# Altium PCB Main.PcbDoc
Units mil, origin at the board's own origin, x right, y up, seen from the top; angles counter-clockwise.
Board outline 2645 x 3720 mil, 2 copper layers (Top Layer, Bottom Layer); 53 components, 48 nets, 213 pads, 44 vias.
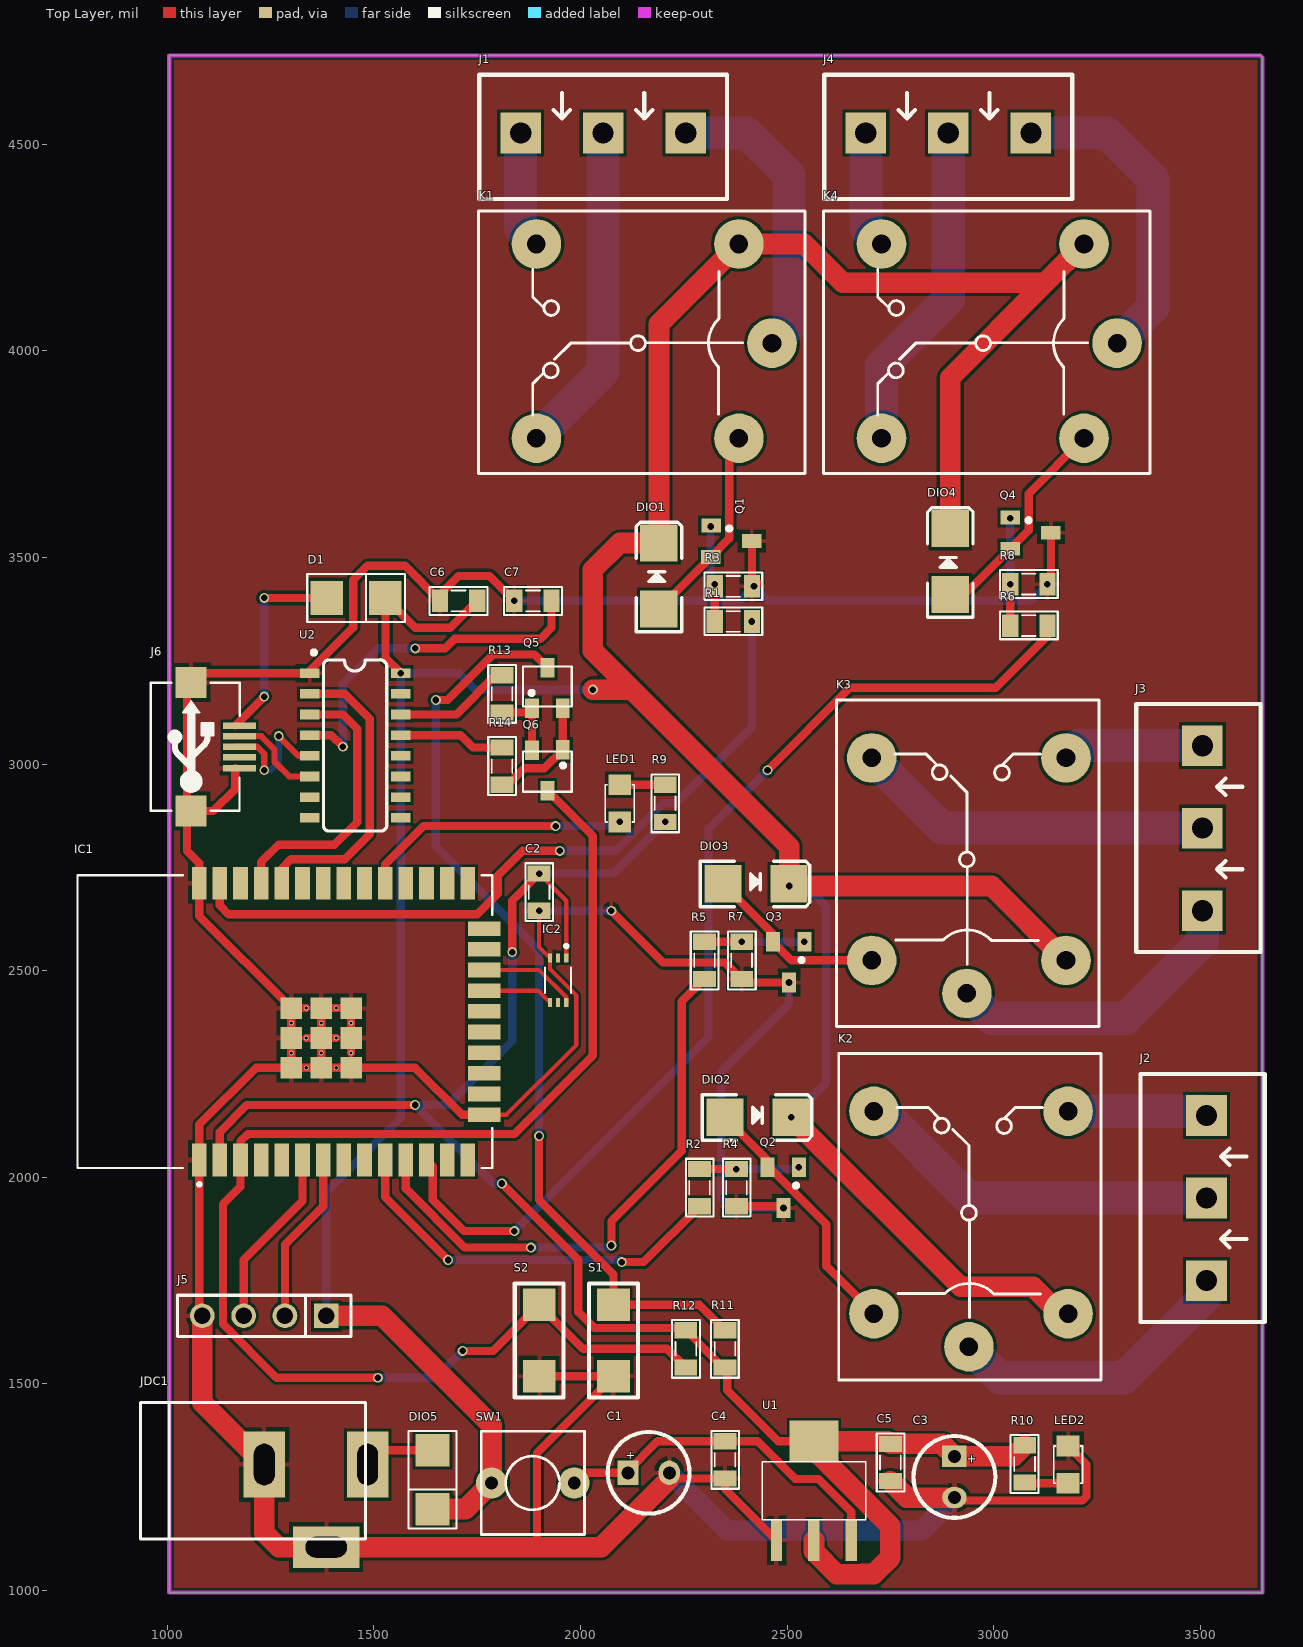
[diagram p0: Top Layer view]
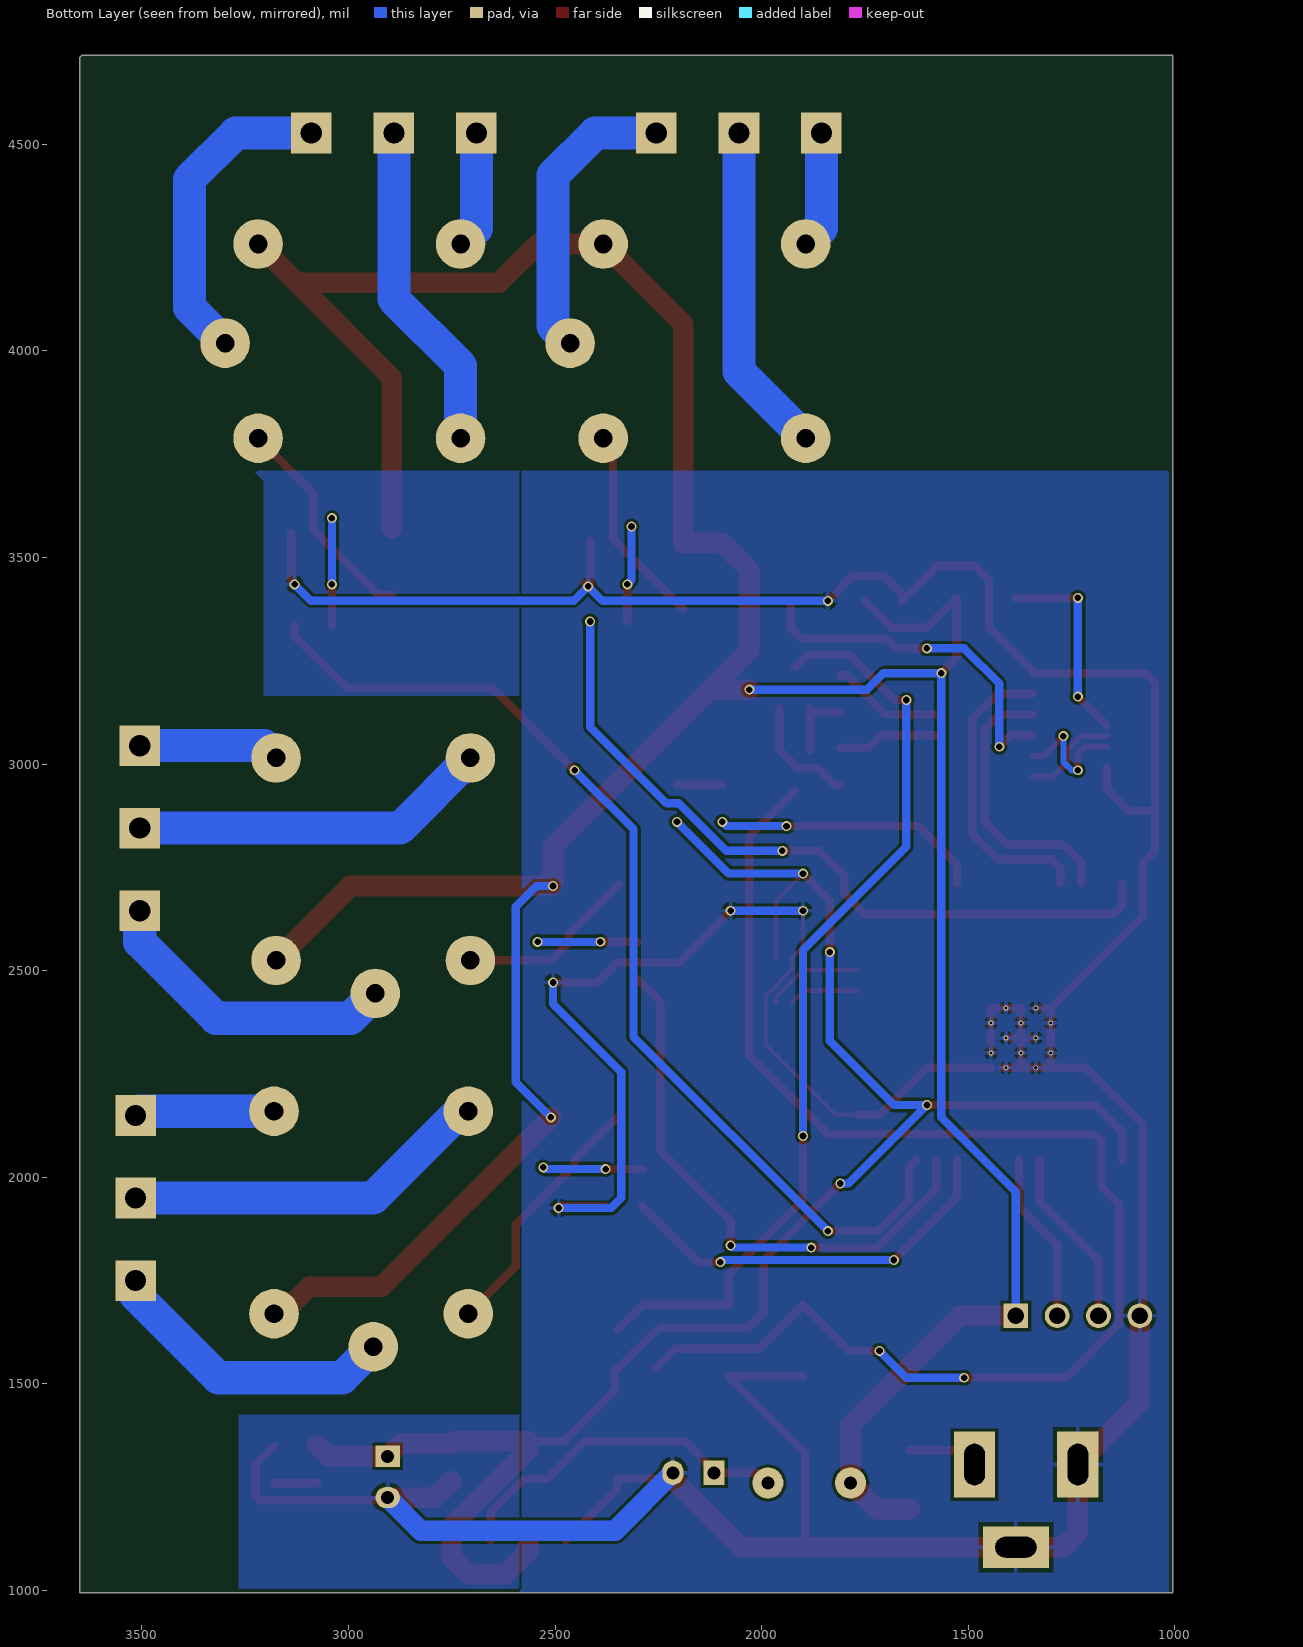
[diagram p1: Bottom Layer view, seen from below]
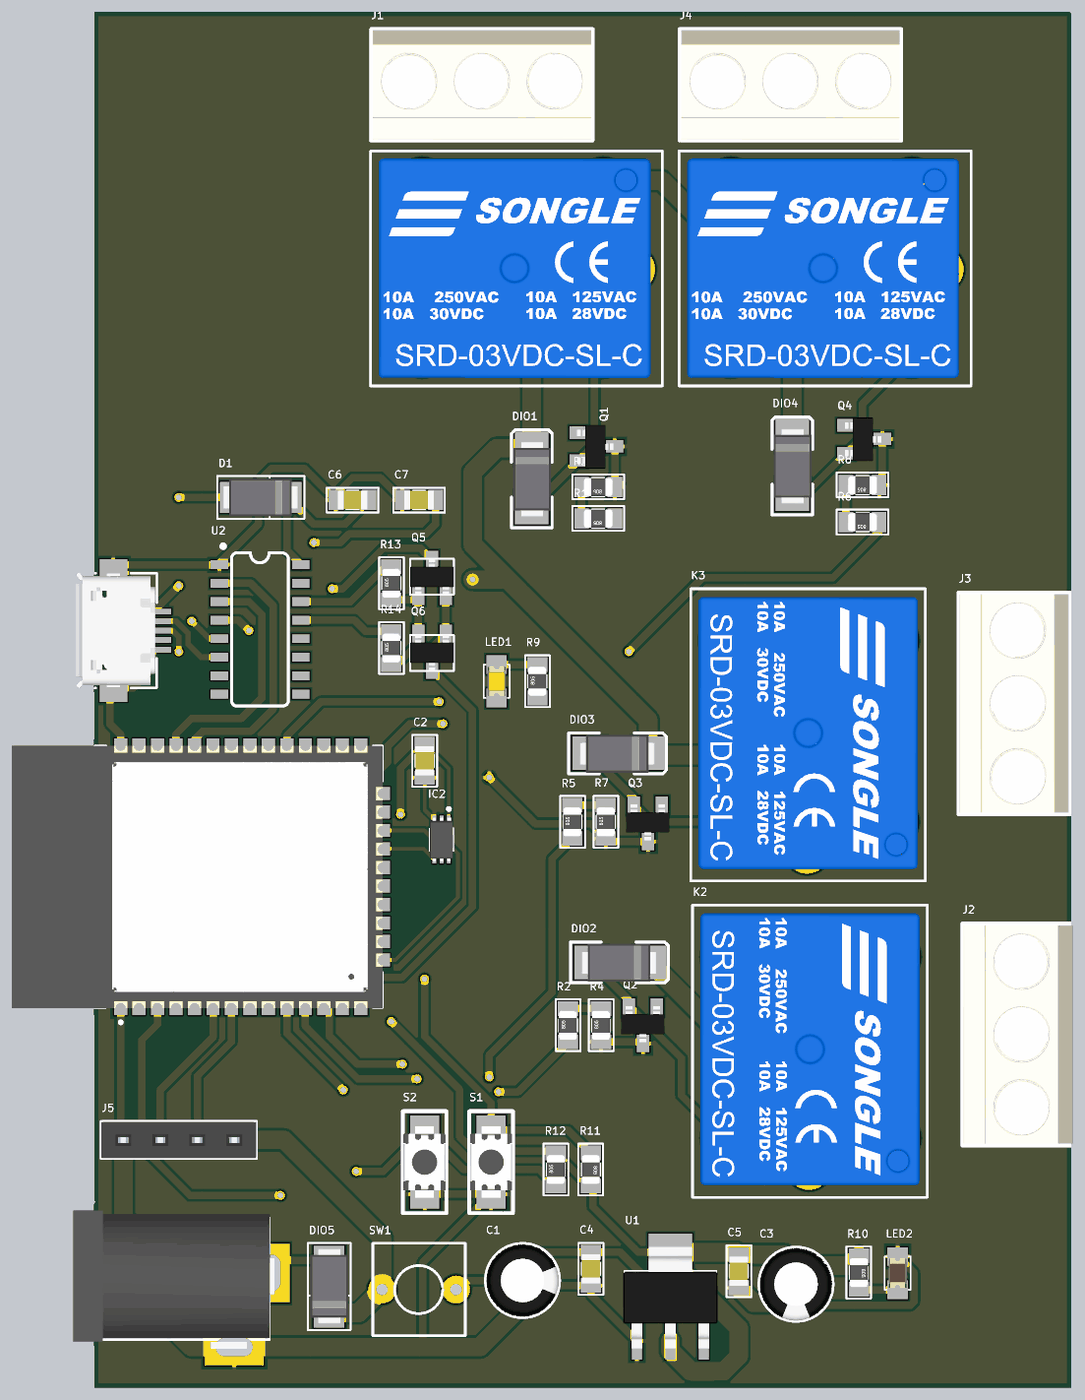
[diagram p2: 3D render of the assembled board from above, using the file's embedded part models]

## Layer stack, top to bottom
Top Solder: solder mask 0.4, Solder Resist, Dk 3.5
Top Layer: signal copper 1.4
Dielectric 1: dielectric 12.6, FR-4, Dk 4.8
Bottom Layer: signal copper 1.4
Bottom Solder: solder mask 0.4, Solder Resist, Dk 3.5

## Board outline
1005,995 1005,4680 1005,4715 3645,4715 3650,4710 3650,995

## Design rules (kind name [scope] priority, off if disabled: settings)
Clearance [All] p1: gap=7 ignorepadtopadclearanceinfootprint=TRUE
DiffPairsRouting [All] p1: maxlimit=10 minlimit=10 mostfreqgap=10 toplayer_minwidth=15 toplayer_maxwidth=15 toplayer_prefwidth=15 bottomlayer_minwidth=15 bottomlayer_maxwidth=15 bottomlayer_prefwidth=15 maxuncoupledlength=500
PolygonConnect [All] p1: connectstyle=Relief reliefconductorwidth=10 reliefentries=4 polygonreliefangle="90 Angle" airgapwidth=10
RoutingVias [All] p1: holewidth=16 width=24 viastyle="Through Hole" minholewidth=12 minwidth=20 maxholewidth=20 maxwidth=28
SolderMaskExpansion [All] p1: expansion=4
Width [All] p1: maxlimit=80 minlimit=10 preferedwidth=20
29 further rules are at their usual default settings.

## Classes and differential pairs
component class U_MCU: C1 C2 C3 C4 C5 C6 C7 D1 DIO5 IC1 IC2 J5 J6 JDC1 LED1 LED2 Q5 Q6 R9 R10 R11 R12 R13 R14 S1 S2 SW1 U1 U2
component class U_Control: DIO1 DIO2 DIO3 DIO4 J1 J2 J3 J4 K1 K2 K3 K4 Q1 Q2 Q3 Q4 R1 R2 R3 R4 R5 R6 R7 R8
differential pair D0: +D0_P -D0_N

## Components (designator, comment, footprint, x,y, rotation, side; value= is the part's Value field where it differs from the comment)
C1 "220uF/10V" C5mm 2165,1285 r0 top
C2 "10uF" CAP_0805 1900,2690 r90 top value=33p
C3 "220uF/10V" C5mm 2905,1275 r270 top
C4 "220nF" CAP_0805 2350,1316.5 r90 top value=33p
C5 "100nF" CAP_0805 2750,1310 r90 top value=33p
C6 "10uF" CAP_0805 1705,3395 r0 top value=33p
C7 "100nF" CAP_0805 1885,3395 r0 top value=33p
D1 "Diode SMD" DIO-214AC(SMA) 1460,3400 r180 top value=1N5007
DIO1 "1N4148" DIO-SMD-106 2190,3455 r270 top value=1N5007
DIO2 "1N4148" DIO-SMD-106 2430,2145 r180 top value=1N5007
DIO3 "1N4148" DIO-SMD-106 2425,2710 r180 top value=1N5007
DIO4 "1N4148" DIO-SMD-106 2895,3490 r270 top value=1N5007
DIO5 "Diode SMD" DIO-214AC(SMA) 1640,1265.5 r90 top value=1N5007
IC1 "ESP32-WROOM-32" MODULE_ESP32-WROOM-32 1284.57,2376.61 r90 top
IC2 "BH1750" BH1750 1945,2490 r270 top
J1 "KF3" KF3-5.08 2255,4527 r180 top
J2 "KF3" KF3-5.08 3515,1750 r90 top
J3 "KF3" KF3-5.08 3505,2645 r90 top
J4 "KF3" KF3-5.08 3090,4527 r180 top
J5 "JP4" JP4-C1T 1385,1665 r180 top
J6 "USB-5" USB-M1 1175,3042 r90 top
JDC1 "Jac DC" DC-IN 1360,1205 r0 top
K1 "Relay-SPDT" RELAY5PIN-10A 2463.5,4018.5 r180 top
K2 "Relay-SPDT" RELAY5PIN-10A 2940,1590 r90 top
K3 "Relay-SPDT" RELAY5PIN-10A 2935,2445 r90 top
K4 "Relay-SPDT" RELAY5PIN-10A 3298.5,4018.5 r180 top
LED1 "LED" LED-0805-Orange 2095,2950 r270 top value="LED 3 ly Single Colour"
LED2 "LED" LED-0805-Red 3180,1260 r90 top value="LED 3 ly Single Colour"
Q1 "2SC1815" SOT23 2365,3540 r270 top value=C1815
Q2 "2SC1815" SOT23 2491.48,1975 r180 top value=C1815
Q3 "2SC1815" SOT23 2505,2520.66 r180 top value=C1815
Q4 "2SC1815" SOT23 3089.33,3560 r270 top value=C1815
Q5 "2SC1815" SOT23D 1920,3184.21 r0 top value=C1815
Q6 "2SC1815" SOT23D 1920,2985 r180 top value=C1815
R1 "330R" RES-SMD-0805 2370,3345 r180 top
R2 "330R" RES-SMD-0805 2287.98,1975 r90 top
R3 "100k" RES-SMD-0805 2370,3430 r180 top
R4 "100k" RES-SMD-0805 2377.45,1975 r90 top
R5 "330R" RES-SMD-0805 2300,2525 r90 top
R6 "330R" RES-SMD-0805 3085,3335 r180 top
R7 "100k" RES-SMD-0805 2390.22,2525 r90 top
R8 "100k" RES-SMD-0805 3085,3435.22 r180 top
R9 "10k" RES-SMD-0805 2205,2905 r90 top
R10 "1k" RES-SMD-0805 3075,1306.5 r270 top
R11 "10k" RES-SMD-0805 2350,1585 r270 top
R12 "10k" RES-SMD-0805 2255,1585 r90 top
R13 "10k" RES-SMD-0805 1810,3170 r90 top
R14 "10k" RES-SMD-0805 1810,2995 r90 top
S1 "SW-SMD" "SW 3x2x4" 2080,1605 r270 top
S2 "SW-SMD" "SW 3x2x4" 1900,1605 r270 top
SW1 "SW" SW2 1785,1260.5 r0 top value="SW chip 2 pin"
U1 "LM1117-ADJ" LM1117-SOP 2565,1171.5 r0 top
U2 "CH340C" SOP-16 1455,3045 r270 top

## Footprints (in the part's own frame and the unit in brackets; to place one, negate y for a bottom-side part, rotate by r counter-clockwise, add the part's x,y. Pads: shape width x height; smd on the part's side, far side on the other; paste and mask are expansions set on the pad)
BH1750 [mm] "Light_sensor_I2c"
  rect 0.55x0.25 smd: 1(-1.045,0.525) 2(-1.045,0.025) 3(-1.045,-0.475) 4(1.705,-0.475) 5(1.705,0.025) 6(1.705,0.525)
  silkscreen extent -1.87,-0.77 1.11,0.83, body extent -1.17,-0.77 1.83,0.83, height 0.75
C5mm [mm]
  rect 1.3x1.5 hole 0.8: 1(-1.27,0)
  oval 1.3x1.5 hole 0.8: 2(1.27,0)
  silkscreen extent -2.51,-2.51 2.51,2.51, body extent -2.5,-2.5 2.49,2.5, height 11.01
CAP_0805 [mil]
  rect 39.37x55 smd: 1(-45,0) 2(45,0)
  silkscreen extent -70,-34 70,33, body extent -40,-25 40,25, height 24
DC-IN [mil] "Jac DC input"
  rect 100x160 hole 50 slot 100 at 90 deg: 1(125,100) 2(-125,100)
  rect 160x100 hole 50 slot 100 at 0 deg: 3(25,-100)
  silkscreen extent -425,-80 120,250, body extent -410,-105 134,269, height 434
DIO-214AC(SMA) [mm] "DO-214AC Diode Smallest Size"
  rect 2x2.1 smd: 1(1.88,-0.051) 2(-1.732,-0.051)
  silkscreen extent -2.92,-1.52 3.07,1.42, body extent -2.5,-1.35 2.7,1.25, height 2.4
DIO-SMD-106 [mil]
  rect 90x90.55 smd: 1(80,0) 2(-80,0)
  silkscreen extent -130,-55 135,55, body extent -99,-50 106,52, height 95
JP4-C1T [mm] "4 row, straight, gold plating"
  rect 1.52x1.52 hole 1.02: 1(0,0)
  round 1.52 hole 1.02: 2(2.54,0) 3(5.08,0) 4(7.62,0)
  silkscreen extent -1.52,-1.27 9.14,1.27, body extent -1.52,-1.25 9.14,1.25, height 8.51
KF3-5.08 [mm]
  rect 2.5x2.5 hole 1.3: 1(0,0) 2(5.08,0) 3(10.147,0)
  silkscreen extent -2.54,-3.58 12.7,4.06, body extent -2.42,-3.51 12.58,3.99, height 10
LED-0805-Orange [mil]
  rect 50x55 smd: 1(0,0) 2(90,0)
  silkscreen extent 0,-35 90,35, body extent 5,-25 85,25, height 43
LED-0805-Red [mil]
  rect 50x55 smd: 1(0,0) 2(90,0)
  silkscreen extent 0,-35 90,35, body extent 5,-25 85,25, height 43
LM1117-SOP [mm]
  rect 0.7x2.54 smd: 1(-2.3,-1.27) 2(0,-1.27) 3(2.3,-1.27)
  rect 3x2.54 smd: 2(0,4.826)
  silkscreen extent -3.17,0 3.17,3.56, body extent -3.25,-1.78 3.25,5.18, height 1.68
MODULE_ESP32-WROOM-32 [mm]
  rect 2x0.9 smd: 1(-8.5,5.26) 2(-8.5,3.99) 3(-8.5,2.72) 4(-8.5,1.45) 5(-8.5,0.18) 6(-8.5,-1.09) 7(-8.5,-2.36) 8(-8.5,-3.63) 9(-8.5,-4.9) 10(-8.5,-6.17) 11(-8.5,-7.44) 12(-8.5,-8.71) 13(-8.5,-9.98) 14(-8.5,-11.25) 25(8.5,-11.25) 26(8.5,-9.98) 27(8.5,-8.71) 28(8.5,-7.44) 29(8.5,-6.17) 30(8.5,-4.9) 31(8.5,-3.63) 32(8.5,-2.36) 33(8.5,-1.09) 34(8.5,0.18) 35(8.5,1.45) 36(8.5,2.72) 37(8.5,3.99) 38(8.5,5.26)
  rect 0.9x2 smd: 15(-5.715,-12.25) 16(-4.445,-12.25) 17(-3.175,-12.25) 18(-1.905,-12.25) 19(-0.635,-12.25) 20(0.635,-12.25) 21(1.905,-12.25) 22(3.175,-12.25) 23(4.445,-12.25) 24(5.715,-12.25)
  rect 1.33x1.33 smd: 39_1(-2.835,-0.405) 39_2(-1,-0.405) 39_3(0.835,-0.405) 39_4(-2.835,-2.24) 39_5(-1,-2.24) 39_6(0.835,-2.24) 39_7(-2.835,-4.075) 39_8(-1,-4.075) 39_9(0.835,-4.075)
  round 0.3 hole 0.2: 39_10(-1.917,-0.405) 39_11(-0.082,-0.405) 39_12(-2.835,-1.322) 39_13(-1,-1.322) 39_14(0.835,-1.322) 39_15(-1.917,-2.24) 39_16(-0.082,-2.24) 39_17(-2.835,-3.157) 39_18(-1,-3.157) 39_19(0.835,-3.157) 39_20(-1.917,-4.075) 39_21(-0.082,-4.075)
  silkscreen extent -10.1,-12.75 9,12.75, body extent -10.54,-12.75 8.98,12.75, height 3.2
RELAY5PIN-10A [mil]
  round 120 hole 45: 1(0,0) 2(570,230) 3(570,-240) 4(80,-240) 5(80,230)
  silkscreen extent -80,-320 710,315, body extent -48,-300 688,294, height 102
RES-SMD-0805 [mil]
  rect 39.37x55 smd: 1(-45,0) 2(45,0)
  silkscreen extent -70,-34 70,33, body extent -39,-25 39,25, height 31
SOP-16 [mm]
  rect 0.6x1.2 smd: 1(-4.445,-2.8) 2(-3.175,-2.8) 3(-1.905,-2.8) 4(-0.635,-2.8) 5(0.635,-2.8) 6(1.905,-2.8) 7(3.175,-2.8) 8(4.445,-2.8) 9(4.445,2.8) 10(3.175,2.8) 11(1.905,2.8) 12(0.635,2.8) 13(-0.635,2.8) 14(-1.905,2.8) 15(-3.175,2.8) 16(-4.445,2.8)
  silkscreen extent -5.84,-2.67 5.26,1.95, body extent -4.95,-3.47 4.95,3.47, height 1.75
SOT23 [mm] "SOT 23 _ 1-3-2"
  rect 0.85x1.2 smd: 1(-0.94,-1.245) 2(0.985,-1.25) 3(0.005,1.25)
  silkscreen extent -0.88,-0.25 -0.64,0, body extent -1.47,-1.33 1.53,1.17, height 1.06
SOT23D [mm] "SOT 23C - 1-3-2 - BCE"
  rect 0.85x1.2 smd: 1(-0.95,-1.25) 2(0.94,-1.245) 3(0,1.25)
  silkscreen extent -1.5,-1.14 1.5,1.32, body extent -1.5,-1.17 1.5,1.33, height 1.06
SW2 [mil] "SW button 2pin, 250x 250 mil"
  round 75 hole 31: 1(0,0) 2(200,0)
  silkscreen extent -25,-125 225,125
"SW 3x2x4" [mm]
  rect 2x2 smd: 1(-2.2,0) 2(2.2,0)
  silkscreen extent -3.5,-1.5 3.5,1.5, body extent -2.45,-1.45 2.45,1.45, height 2
USB-M1 [mm]
  rect 0.4x2 smd: 1(1.3,0) 2(0.65,0) 3(0,0) 4(-0.65,0) 5(-1.321,0)
  rect 1.9x1.9 smd: 5(-3.95,2.968) 5(3.95,2.968)
  silkscreen extent -3.94,-0.03 3.94,5.46, body extent -3.98,0.11 4,5.54, height 2.71

## Part data
C1 C3: library part "Cap Pol", "Polarized Capacitor (Axial)", LatestRevisionDate=17-Jul-2002, LatestRevisionNote="Re-released for DXP Platform.", PackageReference=POLAR0.8, Published=8-Jun-2000, Publisher="Altium Limited"
C2 C4 C5 C6 C7: library part CapSMD, "Capacitor", LatestRevisionDate=17-Jul-2002, LatestRevisionNote="Re-released for DXP Platform.", PackageReference=RAD-0.3, Published=8-Jun-2000, Publisher="Altium Limited"
D1 DIO5: "Default Diode", Code - JEDEC=DO-214-AB, Published=8-Jun-2000, Publisher="Altium Limited", Revision="July-2002: Re-released for DXP Platform."
DIO1 DIO2 DIO3 DIO4: library part "Diode SMD", "Default Diode", Code - JEDEC=DO-214-AB, Published=8-Jun-2000, Publisher="Altium Limited", Revision="July-2002: Re-released for DXP Platform."
IC1: "Bluetooth, WiFi Transceiver Module 2.4GHz ~ 2.5GHz Surface Mount", Package="Module Espressif Systems", Digi-Key_Part_Number=1904-1010-1-ND, Digi-Key_Purchase_URL=https://www.digikey.com/product-detail/en/espressif-systems/ESP32-WROOM-32/1904-1010-1-ND/8544305?utm_source=snapeda&utm_medium=aggregator&utm_campaign=symbol, MF="Espressif Systems", MP=ESP32-WROOM-32, SnapEDA_Link=https://www.snapeda.com/parts/ESP32-WROOM-32/Espressif%20Systems/view-part/2753322/?ref=snap
J1 J2 J3 J4: Manufacturer="Würth Elektronik eiSos GmbH", partNo=691103110003, ComponentLink1 Description=Manufacturer, ComponentLink1URL=http://www.we-online.com, ComponentLink2 Description=Datasheet, ComponentLink2URL=http://katalog.we-online.de/em/datasheet/6911031100xx.pdf, Created by="Karrer Zheng", Created Date="29 October 2013", NoPins=3
J5: "WR-PHD 2.54 mm Angled Socket Header", Manufacturer="W¨¹rth Elektronik eiSos GmbH", partNo=613004143121, ComponentLink1 Description=Manufacturer, ComponentLink1URL=http://www.we-online.com, ComponentLink2 Description=Datasheet, ComponentLink2URL=http://katalog.we-online.de/em/datasheet/6130xx143121.pdf, Created by="Karrer Zheng", Created Date="29 March 2013", NoPins=04
J6: Manufacturer=FCI, Manufacturer Part Number=10118193-0001LF, Supplier Part Number 1=609-4616-1-ND, .Checked PCB=RF, .Checked SCH=MM, .Creator=MM, Category="Connectors, Interconnects", ComponentLink1Description=http://portal.fciconnect.com/Comergent//fci/drawing/10118193.pdf, ComponentLink1URL=http://portal.fciconnect.com/Comergent//fci/drawing/10118193.pdf, Connector Type="USB - micro B", Features="Shielded, Solder Retention", Gender=Receptacle, Ingress Protection=-, Mounting Type="Surface Mount, Right Angle, Horizontal", Number of Contacts=5, Packaging="Cut Tape (CT)", Pricing 1="1=0.46, 10=0.433, 25=0.3712, 50=0.3156, 100=0.3032, 250=0.27224, 500=0.25988 (USD)", RoHS="RoHS Compliant", Specifications="USB 2.0", Stock 1=28642, Supplier 1=Digi-Key
JDC1: library part DCIN, "Jac DC input"
K1 K2 K3 K4: "Single-Pole Dual-Throw Relay", LatestRevisionDate=17-Jul-2002, LatestRevisionNote="Re-released for DXP Platform.", PackageReference=MODULE5B, Published=24-Mar-1999, Publisher="Altium Limited"
LED1 LED2: "LED Single colour Green and Red"
Q1 Q2 Q3 Q4: "NPN 600mW, ECB", =C2383
Q5 Q6: library part C1815, "NPN 600mW, ECB", =C2383
R1 R2 R3 R4 R5 R6 R7 R8: library part "Resistor - SMD", "Resistor", Manufacturer="Generic Components", Class=Passive, Published=08/06/2000, Publisher="Altium Hobart Technology Centre"
R9 R10 R11 R12 R13 R14: library part "Resistor - SMD", "Resistor SMD", Manufacturer="Generic Components", Class=Passive, Published=08/06/2000, Publisher="Altium Hobart Technology Centre"
S1 S2: "Switch", LatestRevisionDate=17-Jul-2002, LatestRevisionNote="Re-released for DXP Platform.", PackageReference=SPST-2, Published=24-Mar-1999, Publisher="Altium Limited"
SW1: library part SW2, "Switch button 2 pin"
U1: "800mA Low-Dropout Linear Regulator", Creator="Nguyen Ba Bien", Website=http://group3i.net
U2: "USB to serial chip CH340", Package=Package, Availability=Unavailable, Check_prices=https://www.snapeda.com/parts/CH340C/WCH/view-part/5428851/?ref=eda, MF=WCH, MP=CH340C, Price=None, SnapEDA_Link=https://www.snapeda.com/parts/CH340C/WCH/view-part/5428851/?ref=snap

## Via types
v1: diameter 24, hole 16, Top Layer to Bottom Layer, 44 vias

## Nets (pads, with @x,y where several pads share a name; then routed paths per layer and width w, separated by ;. In a path a pad name is that pad's centre, name@x,y a point inside that pad or via, vN(x,y) a via of type N, cw(c..) or ccw(c..) an arc to the next point about the centre after c; other vN are vias at no path point)
3V3: C2.2 C3.1 C5.2 IC1.2 IC2.1 R9.1 R10.1 R11.2 R12.2 U1.2 | length 4419.9
  Top Layer w10: v1(1900,2735) 1965.68,2669.31 IC2.1
  Top Layer w20: IC1.2 1127.48,2110 1192.48,2175 v1(1600,2175) ; v1(1810,1985) 1995,1800 1995,1673.83 2033.59,1635.24 R12.2@2240,1635.24 ; v1(1835,2545) 1835,2670 1850,2685 v1(1900,2735) ; R12.2 2345,1540 R11.2 2355,1535 2355,1485 2478.5,1361.5 2565,1361.5 U1.2@2565,1340.95
  Top Layer w50: U1.2@2565,1121.5 2565,1095 2620.5,1039.5 2682.59,1039.5 2683.09,1040 2710,1040 2750,1080 2750,1155.95 U1.2@2565,1340.95 ; U1.2@2565,1361.5 2743.5,1361.5 C5.2 2875,1355 C3.1 3048.5,1325 R10.1
  Bottom Layer w20: v1(1810,1985) 1790,1985 v1(1600,2175) 1680,2175 1835,2330 v1(1835,2545) ; v1(1900,2735) 2080,2735 v1(2205,2860)
5V: C6.2 D1.2 DIO1.2 DIO2.2 DIO3.2 DIO4.2 DIO5.2 J5.1 K1.4 K2.4 K3.4 K4.4 SW1.1 U2.16 | length 9319.7
  Top Layer w20: v1(1565.24,3220) 1528.2,3257.03 D1.2 1600.2,3330 1685,3330 C6.2
  Top Layer w50: J5.1 1520,1665 1785,1400 SW1.1 1721.8,1197.3 DIO5.2 ; v1(2030,3180) 2125,3180 ; v1(2510,2145) 2920,1735 3095,1735 3160,1670 K2.4 ; DIO4.2 2895,3935 3125,4165 ; K3.4 2995,2705 2510,2705 DIO3.2 2505,2800 2125,3180 ; K4.4 3125,4165 ; 2125,3180 2030,3275 2030,3470 2095,3535 DIO1.2 2190,4065 K1.4 2541.5,4258.5 2635,4165 3125,4165
  Bottom Layer w20: J5.1 1385,1965 1565.24,2145.24 v1(1565.24,3220) 1705,3220 1745,3180 v1(2030,3180) ; v1(2505,2705) 2545,2705 2595,2655 2595,2230 v1(2510,2145)
C0: J1.1 K1.1 | length 715.9
  Bottom Layer w80: J1.1 2403,4527 2505,4425 2505,4060 K1.1
C1: J2.1 K2.1 | length 723.9
  Bottom Layer w80: K2.1 3015,1515 3315,1515 3515,1715 J2.1
C2: J3.1 K3.1 | length 746.5
  Bottom Layer w80: K3.1 2995,2385 3320,2385 3505,2570 J3.1
C3: J4.1 K4.1 | length 773.7
  Bottom Layer w80: J4.1 3273,4527 3385,4415 3385,4105 K4.1
D0_N: J6.2 U2.6 | length 237.8
  Top Layer w15: J6.2@1165,3067.59 1227.41,3067.59 1260,3035 1260,3005 1295,2970 U2.6
D0_P: J6.3 U2.5 | length 317.2
  Top Layer w15: J6.3@1165,3042 1217.64,3042 1235,3024.64 v1(1235,2985) ; v1(1270,3067.59) 1317.59,3020 U2.5
  Bottom Layer w15: v1(1235,2985) 1250,2985 1270,3005 v1(1270,3067.59)
GND: C1.2 C2.1 C3.2 C4.1 C5.1 C6.1 C7.1 IC1.1 IC1.15 IC1.38 IC1.39_1 IC1.39_2 IC1.39_3 IC1.39_4 IC1.39_5 IC1.39_6 IC1.39_7 IC1.39_8 IC1.39_9 IC1.39_10 IC1.39_11 IC1.39_12 IC1.39_13 IC1.39_14 IC1.39_15 IC1.39_16 IC1.39_17 IC1.39_18 IC1.39_19 IC1.39_20 IC1.39_21 IC2.3 J5.4 J6.5 JDC1.2 JDC1.3 LED2.2 Q1.3 Q2.3 Q3.3 Q4.3 R3.1 R4.1 R7.1 R8.1 S1.2 S2.2 U1.1 U2.1 | length 11852.3
  Top Layer w10: IC1.15 1821.61,2151.61 1990,2320 1990,2440 1926.32,2503.68 IC2.3 1900,2557.45 v1(1900,2645)
  Top Layer w20: J5.4 1077.48,1672.52 IC1.1 1077.48,2127.48 1215,2265 IC1.39_1 ; J6.5@1165,2990 1165,2940 1111.49,2886.49 J6.5@1048.16,2886.49 ; IC1.39_13 IC1.39_5 ; IC1.39_14 IC1.39_3 ; IC1.39_18 IC1.39_5 ; IC1.39_7@1420,2265 IC1.39_17 IC1.39_4 ; IC1.39_7 1600,2265 1713.39,2151.61 IC1.15 ; IC1.39_20 IC1.39_8 IC1.39_21 IC1.39_9 IC1.39_19 IC1.39_6 IC1.39_16 IC1.39_5 ; v1(1840,3395) 1780,3455 1705,3455 1660,3410 C6.1 1575,3480 1485,3480 1450,3445 1450,3330 1344.76,3224.76 U2.1 1070.65,3220 1048.16,3197.51 J6.5@1048.16,2886.49 ; 1895,1105 1895,1333.39 S1.2 S2.2 ; v1(2075,2645) 2200,2520 2350.22,2520 R7.1 2398.77,2471.45 v1(2504.8,2471.45) ; C1.2 2228.5,1271.5 C4.1 2350,1245.95 U1.1 ; R4.1 2487.07,1930 v1(2491.28,1925.79) ; Q1.3 2415,3539.01 R3.1 ; v1(2420,3430) R3.1@2429.21,3439.21 ; C3.2 2905,1218 3214.54,1218 3224.5,1227.96 3224.5,1305.5 LED2.2 ; R8.1 3138.55,3443.77 Q4.3 ; J6.5@1048.16,2886.49 1048.16,2790 1077.48,2760.68 IC1.38 1077.48,2632.52 IC1.39_3 ; IC1.39_1 IC1.39_10 IC1.39_2 IC1.39_11 IC1.39_3 ; IC1.39_1 IC1.39_12 IC1.39_4 ; IC1.39_4 IC1.39_15 IC1.39_5
  Top Layer w50: J5.4 1085,1455 JDC1.2 1235,1140 1270,1105 JDC1.3 1895,1105 2050,1105 2215,1270 C1.2 ; C5.1 2790,1225 C3.2
  Bottom Layer w20: v1(1840,3395) 2385,3395 v1(2420,3430) 2455,3395 3090,3395 v1(3130,3435) ; v1(1900,2645) v1(2075,2645) ; v1(2491.28,1925.79) 2364.21,1925.79 2340,1950 2340,2255 2504.8,2419.8 v1(2504.8,2471.45)
  Bottom Layer w50: C1.2 2355,1145 2825,1145 C3.2
GPIO0: Q5.3 R11.1 S1.1 | length 2260.7
  Top Layer w20: v1(1650,3155) 1678.77,3155 1788.77,3265 1888.43,3265 Q5.3 ; v1@1900,2095 1900,1945 2080,1765 S1.1 2288.39,1691.61 R11.1
  Bottom Layer w20: v1(1650,3155) 1650,2800 1900,2550 v1(1900,2100)
IO5: IC1.29 LED1.2 | length 651.2
  Top Layer w20: IC1.29 1527.48,2757.48 1620,2850 v1@1935,2850
  Bottom Layer w20: v1(1940,2850) 2085,2850 v1(2095,2860)
NC0: J1.2 K1.2 | length 805.4
  Bottom Layer w80: K1.2 2055,3950 J1.2
NC1: J2.2 K2.2 | length 892
  Bottom Layer w80: K2.2 2730,2160 2940,1950 J2.2
NC2: J3.2 K3.2 | length 870.4
  Bottom Layer w80: K3.2 2875,2845 J3.2
NC3: J4.2 K4.2 | length 805.4
  Bottom Layer w80: K4.2 2728.5,3963.5 2890,4125 J4.2
NetC1_1: C1.1 C4.2 SW1.2 U1.3 | length 854.9
  Top Layer w20: SW1.2 2009.5,1285 C1.1 2115,1290 2186.5,1361.5 C4.2 2428.5,1361.5 2520,1270 2575.55,1270 2655.55,1190 U1.3
NetC7_2: C7.2 U2.4 | length 870.8
  Top Layer w20: U2.4 1397,3070 v1(1425,3042) ; v1(1600.2,3280) 1672.48,3280 1695.48,3303 1903,3303 1930,3330 C7.2
  Bottom Layer w20: v1(1425,3042) 1425,3195 1510,3280 v1(1600.2,3280)
NetD1_1: D1.1 J6.1 | length 488.8
  Top Layer w20: J6.1@1165,3093.18 v1(1235,3163.18) ; v1(1235,3402) D1.1
  Bottom Layer w20: v1(1235,3163.18) v1(1235,3402)
NetDIO1_1: DIO1.1 K1.5 Q1.2 | length 493.7
  Top Layer w20: DIO1.1 2190,3375.41 Q1.2 2360,3545.41 2360,3765 K1.5
NetDIO2_1: DIO2.1 K2.5 Q2.2 | length 626.8
  Top Layer w20: DIO2.1 2452.69,2042.31 Q2.2 2457.25,2024.21 2595,1886.47 2595,1785 K2.5
NetDIO3_1: DIO3.1 K3.5 Q3.2 | length 447.7
  Top Layer w20: DIO3.1 2466.2,2588.8 Q3.2 2511.08,2525 K3.5
NetDIO4_1: DIO4.1 K4.5 Q4.2 | length 532.4
  Top Layer w20: DIO4.1 2928.92,3410 Q4.2 3085,3566.08 3085,3655 K4.5
NetDIO5_1: DIO5.1 JDC1.1 | length 171.3
  Top Layer w20: JDC1.1 1519.5,1339.5 DIO5.1
NetIC1_10: IC1.10 R2.1 | length 971.1
  Top Layer w20: IC1.10 1527.48,1952.52 v1(1680,1800) ; v1(2100,1795) 2152.98,1795 R2.1
  Bottom Layer w20: v1(1680,1800) 2095,1800 v1(2100,1795)
NetIC1_11: IC1.11 R5.1 | length 1366.3
  Top Layer w20: IC1.11 1577.48,1972.52 1720,1830 v1(1880,1830) ; v1(2075,1835) 2075,1894 2245,2064 2245,2425 R5.1
  Bottom Layer w20: v1(1880,1830) 2070,1830 v1(2075,1835)
NetIC1_12: IC1.12 R6.1 | length 2537.1
  Top Layer w20: IC1.12 1642.76,2026.69 1642.76,1945.42 1718.18,1870 v1(1840,1870) ; v1(2452.69,2985) 2652.69,3185 3005,3185 3130,3310 R6.1
  Bottom Layer w20: v1(1840,1870) 2310,2340 2310,2842.31 v1(2452.69,2985)
NetIC1_21: IC1.21 IC2.4 | length 171.4
  Top Layer w10: IC1.21 1897.57,2451.61 IC2.4
NetIC1_22: IC1.22 IC2.6 | length 239.1
  Top Layer w10: IC1.22 1899.97,2501.61 1965.68,2435.9 IC2.6
NetIC1_37: IC1.37 R1.1 | length 1821.1
  Top Layer w20: IC1.37 1127.48,2657.52 1148.67,2636.33 1750.07,2636.33 1800,2686.26 1800,2730 1860,2790 v1(1950,2790) v1@1952.48,2790
  Bottom Layer w20: v1(1950,2790) 2085,2790 2200,2905 2230,2905 2415,3090 v1(2415,3345)
NetLED1_1: LED1.1 R9.2 | length 110
  Top Layer w20: LED1.1 R9.2
NetLED2_1: LED2.1 R10.2 | length 105.6
  Top Layer w20: R10.2 3076.5,1260 LED2.1
NetQ1_1: Q1.1 R1.2 R3.2 | length 229.1
  Top Layer w20: R1.2 R3.2
  Bottom Layer w20: v1(2315,3575) 2315,3445 v1(2325,3435)
NetQ2_1: Q2.1 R2.2 R4.2 | length 242.2
  Top Layer w20: R2.2 v1(2377.45,2020)
  Bottom Layer w20: v1(2377.45,2020) 2524.48,2020 v1(2528.48,2024)
NetQ3_1: Q3.1 R5.2 R7.2 | length 242.1
  Top Layer w20: R5.2 v1(2390.22,2570)
  Bottom Layer w20: v1(2390.22,2570) 2390.56,2569.66 v1(2542,2569.66)
NetQ4_1: Q4.1 R6.2 R8.2 | length 260.2
  Top Layer w20: R6.2 v1(3040,3435) R8.2
  Bottom Layer w20: v1(3040,3435) v1(3040,3595)
NetQ5_1: Q5.1 Q6.2 R13.1 | length 177.9
  Top Layer w20: R13.1 1872.6,3125 Q5.1 1882.6,3034.4 Q6.2
NetQ5_2: Q5.2 Q6.1 R14.1 | length 283.5
  Top Layer w20: R14.1 1825,2950 1865,2990 1913.19,2990 Q6.1 1957,3034.61 Q5.2
NetR13_2: R13.2 U2.14 | length 284.1
  Top Layer w20: U2.14 1700,3120 1795,3215 R13.2
NetR14_2: R14.2 U2.13 | length 257.2
  Top Layer w20: U2.13 1710,3070 1740,3040 R14.2
NO0: J1.3 K1.3 | length 284.2
  Bottom Layer w80: J1.3 1855.5,4296.5 K1.3
NO1: J2.3 K2.3 | length 339.3
  Bottom Layer w80: K2.3 3504.5,2160 J2.3
NO2: J3.3 K3.3 | length 342.2
  Bottom Layer w80: K3.3 3204.5,3044.5 J3.3
NO3: J4.3 K4.3 | length 284.2
  Bottom Layer w80: J4.3 2690.5,4296.5 K4.3
nRST: IC1.3 Q6.3 R12.1 S2.1 | length 3394.7
  Top Layer w20: v1(1510,1515) 1265,1515 1135,1645 1135,1935 1177.48,1977.48 IC1.3 1177.48,2087.48 1195,2105 1840,2105 2030,2295 2030,2825.79 Q6.3 ; v1(1715,1580) 1788.39,1580 S2.1 2006.61,1585 2210,1585 R12.1
  Bottom Layer w20: v1(1510,1515) 1650,1515 v1(1715,1580)
RX0: IC1.34 U2.2 | length 733
  Top Layer w20: IC1.34 1277.48,2747.48 1300,2770 1430,2770 1490,2830 1490,3110 1430,3170 U2.2
RXI: IC1.35 U2.3 | length 678.9
  Top Layer w20: IC1.35 1227.48,2762.48 1270,2805 1405,2805 1460,2860 1460,3085 1425,3120 U2.3
SCL: IC1.6 J5.3 | length 436
  Top Layer w20: J5.3 1185,1800 1327.48,1942.48 IC1.6
SDA: IC1.7 J5.2 | length 415.3
  Top Layer w20: J5.2 1285,1837.52 1377.48,1930 IC1.7
pads on no net: IC1.4 IC1.5 IC1.8 IC1.9 IC1.13 IC1.14 IC1.16 IC1.17 IC1.18 IC1.19 IC1.20 IC1.23 IC1.24 IC1.25 IC1.26 IC1.27 IC1.28 IC1.30 IC1.31 IC1.32 IC1.33 IC1.36 IC2.2 IC2.5 J6.4 U2.7 U2.8 U2.9 U2.10 U2.11 U2.12 U2.15

## Polygon pours and split planes (outlines as drawn)
GND on Top Layer "Kyuubi" (solid, remove dead copper, pour order 2): 2065,1070
GND on Top Layer "Kyuubi" (solid, remove dead copper, pour order 0): 1005,995 3650,995 3650,4710 3645,4715 1005,4715 1005,995
GND on Bottom Layer "Kyuubi" (solid, remove dead copper, pour order 14): 2580,3710 3220,3710 3225,3705 3204.5,3684.5 3204.5,3165 2581.3,3165 2580,3166.3
GND on Bottom Layer "Kyuubi" (solid, remove dead copper, pour order 12): 3115,1125
GND on Bottom Layer "Kyuubi" (solid, remove dead copper, pour order 10): 2585.38,1425 3265,1425 3265,1005 2580,1005 2580,1416.53 2583.47,1420
GND on Bottom Layer "Kyuubi" (solid, remove dead copper, pour order 8): 2580,1460
GND on Bottom Layer "Kyuubi" (solid, remove dead copper, pour order 6): 1620,1750
GND on Bottom Layer "Kyuubi" (solid, remove dead copper, pour order 4): 1015,1000 1015,3705 1010,3710 2580,3710 2580,1005 2590,995 1010,995

## Keep-outs
Top Layer:
  lines w10: 1005,995 1005,4680 1005,4715 3645,4715 3650,4710 3650,995 1005,995 ; 1005,995 1005,995

## Text inside footprints (layer, text, board x,y; h text height)
C1: Top Overlay "+" at 2110,1318 h20
C3: Top Overlay "+" at 2938,1330 h20 r270
IC1: Mechanical 13 "ANTENNA" at 930.24,2140.39 h20 r90